# Altium PCB menb_HV_v1.0 - Cu.PcbDoc (part 3 of 3)
Units mil, origin at the board's own origin, x right, y up, seen from the top; angles counter-clockwise.
Board outline 6102.36 x 4921.26 mil, 2 copper layers (Top Layer, Bottom Layer); 139 components, 224 nets, 601 pads, 106 vias.
Unrouted connection lines stored in the file: 1.
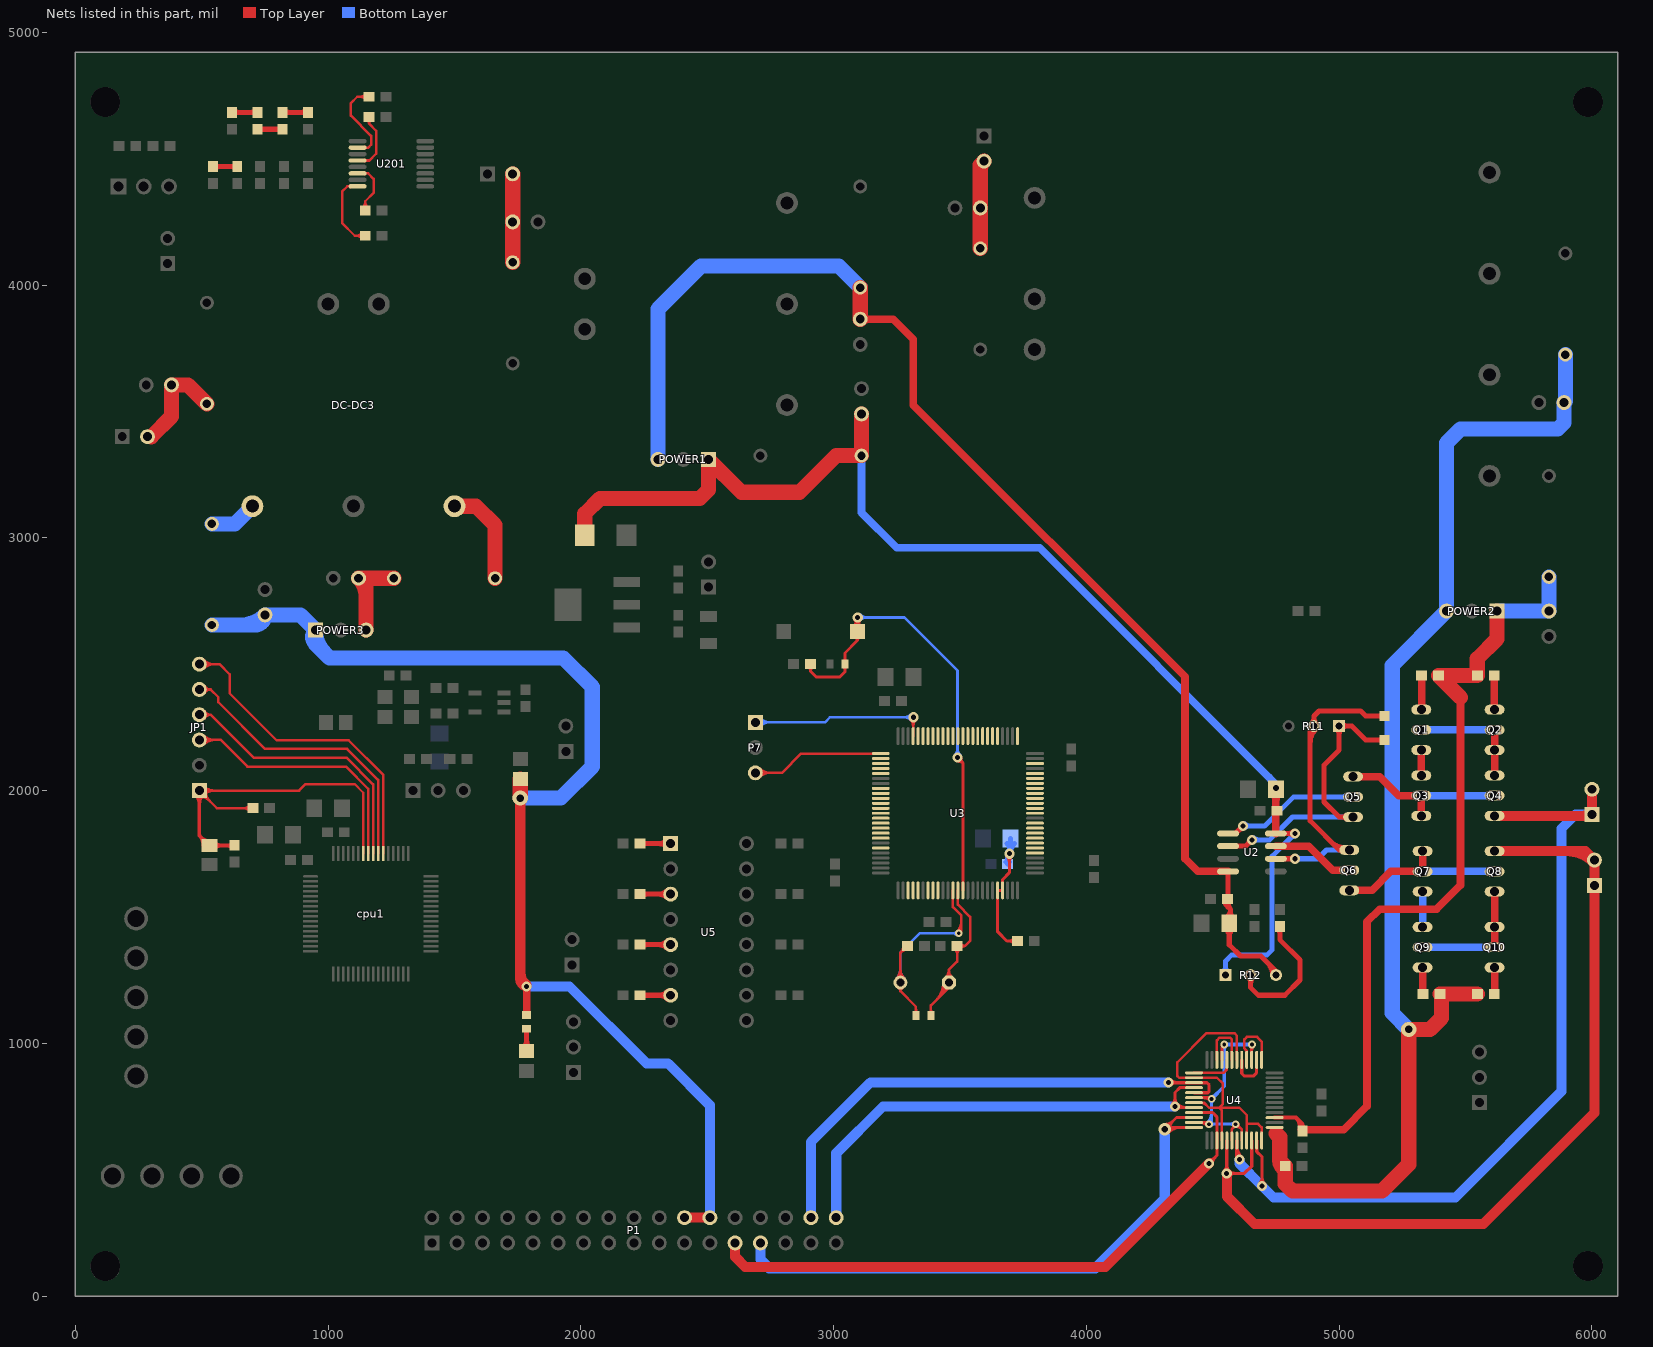
[diagram p3: the nets of this part, all layers, seen from the top]

## Via types
v1: diameter 40, hole 20, Top Layer to Bottom Layer, tented both sides, 48 vias
v2: diameter 20, hole 10, Top Layer to Bottom Layer, tented both sides, 20 vias
v3: diameter 30, hole 15, Top Layer to Bottom Layer, tented both sides, 20 vias
v4: diameter 50, hole 25, Top Layer to Bottom Layer, 5 vias
v5: diameter 50, hole 25, Top Layer to Bottom Layer, tented both sides, 4 vias
v6: diameter 40, hole 20, Top Layer to Bottom Layer, 2 vias
v7: diameter 50, hole 28, Top Layer to Bottom Layer, 1 vias
v8: diameter 30, hole 20, Top Layer to Bottom Layer, tented both sides, 1 vias
v9: diameter 31, hole 15, Top Layer to Bottom Layer, tented both sides, 1 vias
v10: diameter 70, hole 35, Top Layer to Bottom Layer, tented both sides, 1 vias
v11: diameter 60, hole 30, Top Layer to Bottom Layer, tented both sides, 1 vias
v12: diameter 58, hole 28, Top Layer to Bottom Layer, 1 vias
v13: diameter 60, hole 30, Top Layer to Bottom Layer, 1 vias

## Nets (pads, with @x,y where several pads share a name; then routed paths per layer and width w, separated by ;. In a path a pad name is that pad's centre, name@x,y a point inside that pad or via, vN(x,y) a via of type N, cw(c..) or ccw(c..) an arc to the next point about the centre after c; other vN are vias at no path point) (continued)
NetDC-DC3_3: DC-DC3.3 P_L9.1 | length 401.1
  Top Layer w60: DC-DC3.3@1500,3125 1585,3125 1660,3050 P_L9.1@1660,2840
NetDC-DC3_5: DC-DC3.5 P_L8.1 | length 189
  Bottom Layer w60: P_L8.1@540,3055 630,3055 DC-DC3.5@700,3125
NetLED10_1: LED10.1 R60.1 | length 154.7
  Top Layer w20: LED10.1@1772.58,981.79 ccw(c1742.61,1011.76) 1785,1011.76 ccw(c1827.39,1011.76) LED10.1@1797.42,981.79 ; LED10.1@1785,969.37 R60.1@1785,1057.44
NetP_C1_1: P_C1.1 P_F1.2 P_L2.1 | length 350
  Top Layer w60: P_L2.1@1730,4090 P_C1.1@1730,4250 P_F1.2@1730,4440
NetP_C5_1: P_C5.1 P_F2.2 P_L4.1 | length 390.5
  Top Layer w60: P_L4.1@3580,4145 P_C5.1@3580,4305 3580,4475 P_F2.2@3595,4490 ; 3580,4454.93 cw(c3630.07,4454.93) P_F2.2@3594.67,4490.33
NetP_C7_1: P_C7.1 P_F3.2 P_L7.1 | length 424.2
  Top Layer w40: P_F3.2@285,3400 P_F3.2@300,3400
  Top Layer w60: P_F3.2@300,3400 380,3480 P_C7.1@380,3605 445,3605 P_L7.1@520,3530
NetQ1_1: Q1.1 R9.1 | length 135
  Top Layer w20: Q1.1@5325,2320 Q1.1@5325,2321.54
  Top Layer w30: Q1.1@5326.54,2321.54 R9.1@5326.54,2455
NetQ1_2: Q1.2 Q2.2 Q2.3 Q4.1 | length 470
  Top Layer w30: Q4.1@5615,2060 Q2.3@5615,2160 Q2.2@5615,2240
  Bottom Layer w30: Q1.2@5325,2240 Q2.2@5615,2240
NetQ1_3: Q1.3 Q3.1 | length 100
  Top Layer w30: Q3.1@5325,2060 Q1.3@5325,2160
NetQ2_1: Q2.1 R10.1 | length 135.6
  Top Layer w30: R10.1@5613.46,2455 5613.46,2321.54 Q2.1@5615,2320
NetQ3_2: Q3.2 Q3.3 Q4.2 Q5.3 | length 671.1
  Top Layer w30: Q5.3@5055,2055 5160,2055 5235,1980 Q3.2@5325,1980 Q3.3@5325,1900
  Bottom Layer w30: Q3.2@5325,1980 Q4.2@5615,1980
NetQ5_1: pad.0@5180,2200 Q5.1 R11.1 U2.2 | length 1499
  Top Layer w20: U2.2@4560.51,1780 4630,1780 v1(4655,1805) ; v1@4645,1805 cw(c4620.86,1805) 4637.93,1787.93 cw(c4655,1770.86) v1@4655,1795 ; R11.1@4990.37,2245.37 cw(c4967.11,2222.11) 5000,2222.11 cw(c5032.89,2222.11) 5009.63,2245.37 cw(c5032.89,2222.11) 5032.89,2255 cw(c5032.89,2287.89) R11.1@5009.63,2264.63 ; Q5.1@5028.47,1888.15 ccw(c5011.93,1871.62) 5011.93,1895 ccw(c5011.93,1918.38) Q5.1@5028.47,1901.85 ; Q5.1@5055,1895 5000,1895 4940,1955 4940,2100 5000,2160 R11.1@5000,2255 5050,2255 5105,2200 pad.0@5180,2200 ; pad.0@5173.15,2193.15 ccw(c5156.62,2176.62) 5156.62,2200 ccw(c5156.62,2223.38) pad.0@5173.15,2206.85
  Bottom Layer w20: v1(4655,1805) 4725,1805 4815,1895 Q5.1@5055,1895 ; v1@4662.07,1797.93 cw(c4679.14,1780.86) 4679.14,1805 cw(c4679.14,1829.14) v1@4662.07,1812.07 ; Q5.1@5028.47,1888.15 ccw(c5011.93,1871.62) 5011.93,1895 ccw(c5011.93,1918.38) Q5.1@5028.47,1901.85
NetQ5_2: Q5.2 U2.1 | length 667.1
  Top Layer w20: U2.1@4560.51,1830 4590,1830 v1(4620,1860) ; v1@4610,1860 cw(c4585.86,1860) 4602.93,1842.93 cw(c4620,1825.86) v1@4620,1850
  Bottom Layer w20: v1(4620,1860) 4705,1860 4820,1975 Q5.2@5055,1975 ; v1@4627.07,1852.93 cw(c4644.14,1835.86) 4644.14,1860 cw(c4644.14,1884.14) v1@4627.07,1867.07 ; Q5.2@5028.47,1968.15 ccw(c5011.93,1951.62) 5011.93,1975 ccw(c5011.93,1998.38) Q5.2@5028.47,1981.85
NetQ6_1: pad.0@5180,2295 Q6.1 R11.2 U2.6 | length 1606.7
  Top Layer w20: U2.6@4749.49,1730 v1(4825,1730) ; v1@4817.93,1722.93 ccw(c4800.86,1705.86) 4800.86,1730 ccw(c4800.86,1754.14) v1@4817.93,1737.07 ; 4885,2185.9 cw(c4969.1,2185.9) R11.2@4909.63,2245.37 ; 4885,2234.18 cw(c4920.82,2234.18) R11.2@4895.49,2259.51 ; R11.2@4890.37,2264.63 ccw(c4867.11,2287.89) 4900,2287.89 ccw(c4932.89,2287.89) R11.2@4909.63,2264.63 ; 4969.1,1795.9 ccw(c5020.31,1847.11) Q6.1@5020.31,1774.68 ; Q6.1@5012.79,1758.9 ccw(c5000,1748.54) 5000,1765 ; Q6.1@5012.79,1771.1 cw(c5000,1781.46) 5000,1765 ; Q6.1@5040,1765 5000,1765 ; pad.0@5173.15,2288.15 ccw(c5156.62,2271.62) 5156.62,2295 ccw(c5156.62,2318.38) pad.0@5173.15,2301.85 ; pad.0@5180,2295 5105,2295 5085,2315 4920,2315 4900,2295 R11.2@4900,2255 4885,2240 4885,1880 5000,1765
  Bottom Layer w20: v1(4825,1730) 4915,1730 4950,1765 Q6.1@5040,1765 ; v1@4832.07,1722.93 cw(c4849.14,1705.86) 4849.14,1730 cw(c4849.14,1754.14) v1@4832.07,1737.07 ; Q6.1@5013.47,1758.15 ccw(c4996.93,1741.62) 4996.93,1765 ccw(c4996.93,1788.38) Q6.1@5013.47,1771.85
NetQ6_2: Q6.2 U2.7 | length 329.9
  Top Layer w30: U2.7@4749.49,1780 4880,1780 4975,1685 Q6.2@5040,1685
NetQ6_3: Q6.3 Q7.2 Q7.3 Q8.2 | length 686.1
  Top Layer w30: Q6.3@5040,1605 5130,1605 5205,1680 Q7.2@5330,1680 Q7.3@5330,1760
  Bottom Layer w30: Q7.2@5330,1680 Q8.2@5615,1680
NetQ7_1: Q7.1 Q9.3 | length 140
  Bottom Layer w30: Q9.3@5330,1460 Q7.1@5330,1600
NetQ8_1: Q8.1 Q9.2 Q10.2 Q10.3 | length 505
  Top Layer w30: Q10.2@5615,1380 Q10.3@5615,1460 Q8.1@5615,1600
  Bottom Layer w30: Q9.2@5330,1380 Q10.2@5615,1380
NetQ9_1: Q9.1 R14.2 | length 103.5
  Top Layer w30: R14.2@5330,1196.54 Q9.1@5330,1300
NetQ10_1: Q10.1 R15.2 | length 105.6
  Top Layer w30: R15.2@5613.46,1195 5615,1196.54 Q10.1@5615,1300
NetR8_2: R8.2 U5.5 | length 237.3
  Top Layer w20: R8.2@2233.46,1390 U5.5@2355,1390 U5.5@2360,1390 ; R8.2@2242.28,1383.15 cw(c2258.81,1366.62) 2258.81,1390 cw(c2258.81,1413.38) R8.2@2242.28,1396.85 ; U5.5@2341.19,1376.19 ccw(c2307.86,1342.86) 2307.86,1390 ccw(c2307.86,1437.14) U5.5@2341.19,1403.81
NetR12_2: R12.2 R13.2 | length 615.3
  Top Layer w20: R12.2@4640.37,1260.37 cw(c4617.11,1237.11) 4650,1237.11 cw(c4682.89,1237.11) R12.2@4659.63,1260.37 ; R12.2@4650,1270 4650,1220 4680,1190 4785,1190 4845,1250 4845,1330 4765,1410 R13.2@4765,1461.54 ; R13.2@4758.15,1452.72 cw(c4741.62,1436.19) 4765,1436.19 cw(c4788.38,1436.19) R13.2@4771.85,1452.72
NetR19_2: R19.2 U5.7 | length 237.3
  Top Layer w20: R19.2@2233.46,1190 U5.7@2355,1190 U5.7@2360,1190 ; R19.2@2242.28,1183.15 cw(c2258.81,1166.62) 2258.81,1190 cw(c2258.81,1213.38) R19.2@2242.28,1196.85 ; U5.7@2341.19,1176.19 ccw(c2307.86,1142.86) 2307.86,1190 ccw(c2307.86,1237.14) U5.7@2341.19,1203.81
NetR23_2: R23.2 U5.1 | length 232.3
  Top Layer w20: R23.2@2233.46,1790 U5.1@2355,1790 ; R23.2@2242.28,1783.15 cw(c2258.81,1766.62) 2258.81,1790 cw(c2258.81,1813.38) R23.2@2242.28,1796.85 ; U5.1@2341.19,1776.19 ccw(c2307.86,1742.86) 2307.86,1790 ccw(c2307.86,1837.14) U5.1@2341.19,1803.81
NetR24_2: R24.2 U5.3 | length 232.3
  Top Layer w20: R24.2@2233.46,1590 U5.3@2355,1590 ; R24.2@2242.28,1583.15 cw(c2258.81,1566.62) 2258.81,1590 cw(c2258.81,1613.38) R24.2@2242.28,1596.85 ; U5.3@2341.19,1576.19 ccw(c2307.86,1542.86) 2307.86,1590 ccw(c2307.86,1637.14) U5.3@2341.19,1603.81
NetR200_1: R200.1 R201.2 | length 173.5
  Top Layer w20: R200.1@620,4683.46 R201.2@720,4683.46 ; R200.1@626.85,4676.62 cw(c643.38,4660.08) 643.38,4683.46 cw(c643.38,4706.85) R200.1@626.85,4690.31 ; R201.2@713.15,4676.62 ccw(c696.62,4660.08) 696.62,4683.46 ccw(c696.62,4706.85) R201.2@713.15,4690.31
NetR201_1: R201.1 R202.2 | length 173.5
  Top Layer w20: R201.1@720,4616.54 R202.2@820,4616.54 ; R201.1@726.85,4609.69 cw(c743.38,4593.15) 743.38,4616.54 cw(c743.38,4639.92) R201.1@726.85,4623.38 ; R202.2@813.15,4609.69 ccw(c796.62,4593.15) 796.62,4616.54 ccw(c796.62,4639.92) R202.2@813.15,4623.38
NetR202_1: R202.1 R205.2 | length 173.5
  Top Layer w20: R202.1@820,4683.46 R205.2@920,4683.46 ; R202.1@826.85,4676.62 cw(c843.38,4660.08) 843.38,4683.46 cw(c843.38,4706.85) R202.1@826.85,4690.31 ; R205.2@913.15,4676.62 ccw(c896.62,4660.08) 896.62,4683.46 ccw(c896.62,4706.85) R205.2@913.15,4690.31
NetR203_1: R203.1 U201.2 | length 408.8
  Top Layer w10: U201.2@1116.14,4543.98 1158.98,4543.98 1170,4555 1170,4590 1090,4670 1090,4720 1115,4745 R203.1@1161.54,4745 ; U201.2@1145.44,4541.25 cw(c1152.03,4534.66) 1152.03,4543.98 cw(c1152.03,4553.29) U201.2@1145.44,4546.7 ; R203.1@1149.18,4734.62 ccw(c1124.11,4709.55) 1124.11,4745 ccw(c1124.11,4780.45) R203.1@1149.18,4755.38
NetR204_1: R204.1 U201.4 | length 290.2
  Top Layer w10: U201.4@1116.14,4492.8 1162.8,4492.8 1190,4520 1190,4610 1161.54,4638.46 ; U201.4@1145.44,4490.07 cw(c1152.03,4483.48) 1152.03,4492.8 cw(c1152.03,4502.11) U201.4@1145.44,4495.52 ; R204.1@1153.74,4652.56 cw(c1144.91,4638.47) 1161.54,4638.47 ; R204.1@1161.54,4665 1161.54,4638.46 ; R204.1@1169.33,4652.56 ccw(c1178.17,4638.47) 1161.54,4638.47
NetR206_1: R206.1 U201.6 | length 282
  Top Layer w10: U201.6@1116.14,4441.61 1158.39,4441.61 1180,4420 1180,4365 1146.54,4331.54 R206.1@1146.54,4295 ; R206.1@1136.15,4305.38 ccw(c1111.08,4330.45) 1146.54,4330.45 ccw(c1181.99,4330.45) R206.1@1156.92,4305.38 ; U201.6@1145.44,4438.89 cw(c1152.03,4432.3) 1152.03,4441.61 cw(c1152.03,4450.93) U201.6@1145.44,4444.34
NetR207_1: R207.1 U201.8 | length 377.2
  Top Layer w10: U201.8@1086.84,4387.7 ccw(c1080.25,4381.12) 1080.25,4390.43 ccw(c1080.25,4399.75) U201.8@1086.84,4393.16 ; U201.8@1116.14,4390.43 1075.43,4390.43 1055,4370 1055,4245 1105,4195 R207.1@1146.54,4195 ; R207.1@1134.18,4184.62 ccw(c1109.11,4159.55) 1109.11,4195 ccw(c1109.11,4230.45) R207.1@1134.18,4205.38
NetR211_1: R211.1 R212.2 | length 168.5
  Top Layer w20: R212.2@545,4468.46 R211.1@640,4468.46 ; R212.2@551.85,4461.62 cw(c568.38,4445.08) 568.38,4468.46 cw(c568.38,4491.85) R212.2@551.85,4475.31 ; R211.1@633.15,4461.62 ccw(c616.62,4445.08) 616.62,4468.46 ccw(c616.62,4491.85) R211.1@633.15,4475.31
NetU4_4: U4.4 U4.9 U4.12 U4.30 U4.38 U4.43 | length 1330.5
  Top Layer w10: U4.43@4425.55,765.16 4464.84,765.16 4485,745 4525,745 ; U4.43@4455.08,764.25 cw(c4455.08,738.49) 4473.29,756.71 ; U4.4@4535.79,615.55 4535.79,734.21 4525,745 ; U4.30@4594.84,934.45 4594.84,1030.16 4585,1040 4475,1040 4360,925 4360,870 4366.42,863.58 U4.38@4425.55,863.58 4516.42,863.58 4540,840 4540,760 4525,745 ; U4.9@4634.21,615.55 4634.21,680.79 ; U4.12@4693.27,615.55 4693.27,666.73 4679.21,680.79 4634.21,680.79 ; 4525,745 4605,745 4634.21,715.79 4634.21,680.79
NetU4_6: U4.6 U4.8 U4.27 U4.33 U4.42 U4.47 | length 1399.3
  Top Layer w10: v3@4478.58,686.42 v3(4485,680) ; v3@4490.16,784.84 v3(4495,780) ; U4.6@4575.16,615.55 4575.16,660.16 ; v3@4580.25,677.79 cw(c4561.73,673.58) 4575.16,660.16 ; 4581.46,666.46 cw(c4590,657.93) v3@4590,670 ; v3@4590.34,670.01 cw(c4591.47,637.41) 4614.53,660.47 ; v3@4600,680 ccw(c4612.07,680) 4603.54,671.46 ; U4.8@4614.53,615.55 4614.53,660.47 ; v3@4653.9,993.9 v3(4655,995) ; 4575.16,660.16 4590,675 4600,675 4614.53,660.47
  Top Layer w12: U4.47@4425.55,686.42 v3@4478.58,686.42 ; U4.42@4425.55,784.84 v3@4490.16,784.84 ; U4.47@4447.78,686.42 cw(c4447.78,642.78) v3@4478.64,673.64 ; 4461.58,784.84 cw(c4461.58,746.58) v3@4488.64,773.64 ; U4.33@4535.79,934.45 4535.79,985.79 v3(4545,995) ; v3@4648.64,988.64 cw(c4635.93,975.93) 4653.9,975.93 ; U4.27@4653.9,934.45 v3@4653.9,993.9 ; 4653.9,970.61 cw(c4679.39,970.61) v3@4661.36,988.64
  Bottom Layer w12: v3@4478.64,686.36 ccw(c4439.13,725.87) 4495,725.87 ; v3@4487.12,677.88 ccw(c4468.1,696.9) 4495,696.9 ; v3@4488.64,773.64 cw(c4473.27,758.27) 4495,758.27 cw(c4516.73,758.27) v3@4501.36,773.64 ; v3@4491.36,673.64 cw(c4506.73,658.27) 4506.73,680 cw(c4506.73,701.73) v3@4491.36,686.36 ; v3(4495,780) 4495,690 v3(4485,680) v3(4590,680) ; v3@4583.64,673.64 ccw(c4568.27,658.27) 4568.27,680 ccw(c4568.27,701.73) v3@4583.64,686.36
  Bottom Layer w15: v3(4495,780) 4545,830 v3(4545,995) v3(4655,995) ; v3@4495,787.5 ccw(c4495,805.61) 4507.8,792.8 ccw(c4520.61,780) v3@4502.5,780 ; v3@4539.7,989.7 cw(c4526.89,976.89) 4545,976.89 cw(c4563.11,976.89) 4550.3,989.7 cw(c4563.11,976.89) 4563.11,995 cw(c4563.11,1013.11) v3@4550.3,1000.3 ; v3@4649.7,989.7 ccw(c4636.89,976.89) 4636.89,995 ccw(c4636.89,1013.11) v3@4649.7,1000.3
NRST: C33.2 R17.1 S1.1 U3.14 | length 2268.7
  Top Layer w10: v1@3093.62,2683.62 v1(3095,2685)
  Top Layer w12: C33.2@2899.92,2489.31 cw(c2885.71,2471.54) 2908.46,2471.54 ; C33.2@2908.46,2500 2908.46,2471.54 ; C33.2@2917.01,2489.31 ccw(c2931.22,2471.54) 2908.46,2471.54 ; R17.1@3039.03,2490.56 cw(c3025.75,2477.28) 3044.53,2477.28 cw(c3063.31,2477.28) R17.1@3050.03,2490.56 ; R17.1@3039.03,2509.44 ccw(c3025.75,2522.72) 3044.53,2522.72 ccw(c3063.31,2522.72) R17.1@3050.03,2509.44 ; S1.1@3077.69,2647.31 ccw(c3044.29,2683.62) v1@3093.62,2683.62 ; v1@3083.33,2677.27 cw(c3062.81,2663.69) 3086.58,2657.32 cw(c3107.25,2651.79) v1@3099.84,2671.86 ; S1.1@3083.97,2608.54 cw(c3077.26,2593.62) 3093.62,2593.62 ; v1@3085.1,2675.1 cw(c3064.53,2654.53) S1.1@3093.62,2654.53 ; v1@3090.24,2671.83 cw(c3085.22,2657.96) 3099.47,2661.78 cw(c3110.66,2664.77) v1@3103.57,2673.93 ; S1.1@3093.62,2647.87 cw(c3132.13,2647.87) v1@3104.9,2675.1 ; S1.1@3103.27,2608.54 ccw(c3109.98,2593.62) 3093.62,2593.62 ; S1.1@3109.55,2647.31 cw(c3142.96,2683.62) v1@3093.62,2683.62 ; v1(3490,2130) 3510.9,2109.09 ; v1@3491.39,2116.07 cw(c3493.78,2091.98) 3510.9,2109.1 ; v1@3503.93,2128.61 ccw(c3528.02,2126.22) 3510.9,2109.1 ; U3.14@3510.9,1605 3510.9,2109.09 ; 2908.46,2471.54 2930,2450 3025,2450 3044.53,2469.53 R17.1@3044.53,2500 3044.53,2544.53 3093.62,2593.62 ; 3093.62,2593.62 S1.1@3093.62,2630 v1@3093.62,2683.62
  Bottom Layer w12: v1(3095,2685) 3280,2685 3490,2475 v1(3490,2130) ; v1@3104.9,2675.1 cw(c3128.8,2651.2) 3128.8,2685 cw(c3128.8,2718.8) v1@3104.9,2694.9 ; v1@3480.1,2139.9 ccw(c3456.2,2163.8) 3490,2163.8 ccw(c3523.8,2163.8) v1@3499.9,2139.9
OSC_IN: C26.1 R16.2 U3.12 Y1.2 | length 1379.3
  Top Layer w10: Y1.2@3247.99,1255.95 ccw(c3209.47,1294.46) 3263.94,1294.46 ccw(c3318.4,1294.46) Y1.2@3279.89,1255.95 ; Y1.2@3255.06,1248.88 ccw(c3233.62,1270.32) 3263.94,1270.32 ccw(c3294.26,1270.32) Y1.2@3272.82,1248.88 ; Y1.2@3255.21,1219.2 cw(c3249.69,1206.06) 3263.94,1206.06 ; 3267.86,1361.32 cw(c3289.57,1339.61) C26.1@3289.57,1370.32 ; Y1.2@3272.67,1219.2 ccw(c3278.18,1206.06) 3263.94,1206.06 ; C26.1@3274.89,1384.68 cw(c3237.49,1383.85) 3263.94,1357.4 ; C26.1@3291.54,1385 3263.94,1357.4 ; R16.2@3319.26,1120.14 ccw(c3304.28,1135.13) 3325.47,1135.13 ccw(c3346.67,1135.13) R16.2@3331.68,1120.14 ; R16.2@3325.47,1110 3325.47,1144.53 3263.94,1206.06 ; U3.12@3471.53,1605 3471.53,1538.47 3505,1505 3505,1445 v3(3495,1435) ccw(c3470.86,1459.14) 3505,1459.14 ; v3@3487.93,1442.07 ccw(c3446.72,1483.28) 3505,1483.28 ; 3263.94,1206.06 Y1.2@3263.94,1240 3263.94,1357.4
  Bottom Layer w10: Y1.2@3247.99,1255.95 ccw(c3209.47,1294.46) 3263.94,1294.46 ccw(c3318.4,1294.46) Y1.2@3279.89,1255.95 ; Y1.2@3255.06,1248.88 ccw(c3233.62,1270.32) 3263.94,1270.32 ccw(c3294.26,1270.32) Y1.2@3272.82,1248.88 ; Y1.2@3263.94,1240 3263.94,1358.94 3340,1435 v3(3495,1435) ; v3@3487.93,1427.93 ccw(c3470.86,1410.86) 3470.86,1435 ccw(c3470.86,1459.14) v3@3487.93,1442.07
OSC_OUT: C30.1 R16.1 U3.13 Y1.1 | length 1005.4
  Top Layer w10: R16.1@3378.32,1120.14 ccw(c3363.33,1135.13) 3384.53,1135.13 ccw(c3405.72,1135.13) R16.1@3390.74,1120.14 ; R16.1@3384.53,1110 3384.53,1149.53 Y1.1@3453.46,1218.46 ; 3404.16,1169.16 ccw(c3333.32,1240) Y1.1@3433.5,1240 ; 3421.23,1186.23 ccw(c3367.47,1240) Y1.1@3443.5,1240 ; 3438.3,1203.3 ccw(c3401.61,1240) Y1.1@3453.5,1240 ; Y1.1@3440.87,1256.68 ccw(c3409.56,1291.06) 3456.06,1291.06 ; Y1.1@3447.61,1249.29 ccw(c3430.17,1268.43) 3456.06,1268.43 ccw(c3481.95,1268.43) Y1.1@3464.52,1249.29 ; Y1.1@3456.06,1240 3456.06,1291.06 ; Y1.1@3471.25,1256.68 cw(c3502.57,1291.06) 3456.06,1291.06 ; C30.1@3478.08,1374.62 cw(c3453.01,1349.55) 3488.46,1349.55 cw(c3523.92,1349.55) C30.1@3498.85,1374.62 ; U3.13@3491.22,1605 3491.22,1548.78 3540,1500 3540,1405 3520,1385 ; C30.1@3502.13,1376.13 cw(c3520,1362.58) 3520,1385 ; C30.1@3502.13,1393.87 ccw(c3520,1407.42) 3520,1385 ; 3456.06,1291.06 3488.46,1323.46 C30.1@3488.46,1385 3520,1385
OUT1+: P1.25 U4.3 U4.45 | length 2463.8
  Top Layer w12: U4.45@4425.55,725.79 4499.21,725.79 4516.1,708.9 U4.3@4516.1,615.55 4516.1,556.1 v1(4485,525) ; v1@4485,539 ccw(c4485,572.8) 4508.9,548.9 ccw(c4532.8,525) v1@4499,525
  Top Layer w40: P1.25@2610,210 2610,155 2650,115 4075,115 v1(4485,525)
OUT1-: P1.27 U4.46 U4.48 | length 2487.3
  Top Layer w12: v4(4310,660) v4@4316.73,666.73 ; v4@4310,679 ccw(c4310,724.87) 4342.44,692.44 ccw(c4374.87,660) v4@4329,660 ; v4@4314.95,655.05 cw(c4343.15,626.85) 4343.15,666.73 ; v4@4323.44,646.56 cw(c4372.12,597.88) 4372.12,666.73 ; v4@4323.44,673.44 ccw(c4339.62,689.62) 4339.62,666.73 ; U4.48@4425.55,666.73 v4@4316.73,666.73 ; U4.46@4425.55,706.1 4356.1,706.1 v4@4316.73,666.73
  Bottom Layer w40: P1.27@2710,210 2710,145 2745,110 4035,110 4310,385 v4(4310,660)
OUT2+: P1.34 U4.40 U4.44 | length 1990.5
  Top Layer w12: v1@4340.1,759.9 ccw(c4316.2,783.8) 4350,783.8 ccw(c4383.8,783.8) 4359.9,759.9 ccw(c4394.73,794.73) U4.44@4394.73,745.47 ; v1@4359.9,740.1 cw(c4372.87,727.13) 4372.87,745.47 ; U4.44@4425.55,745.47 4360,745.47 4350,755.47 4350,805 4369.21,824.21 U4.40@4425.55,824.21
  Bottom Layer w40: P1.34@3010,310 3010,565 3195,750 v1(4350,750)
OUT2-: P1.32 U4.39 U4.41 | length 2112.8
  Top Layer w13: v1@4326.1,843.9 U4.39@4425.55,843.9 4476.1,843.9 4485,835 4485,810 4479.53,804.53 U4.41@4425.55,804.53 ; v1@4334.55,835.45 cw(c4354.93,815.07) 4354.93,843.9 ; v1@4334.55,854.55 ccw(c4360.25,880.25) 4360.25,843.9
  Bottom Layer w40: P1.32@2910,310 2910,610 3145,845 v1(4325,845)
OUT3+: U4.32 U4.37 | length 193.6
  Top Layer w10: U4.37@4425.55,883.27 4543.27,883.27 4555.47,895.47 U4.32@4555.47,934.45 ; 4547.25,887.25 ccw(c4529.57,904.92) U4.32@4554.57,904.92
OUT3-: U4.31 U4.34 | length 223.6
  Top Layer w10: U4.34@4516.1,934.45 4516.1,1011.1 4527,1022 4568,1022 4575.16,1014.84 U4.31@4575.16,934.45
OUT4+: U4.26 U4.29 | length 173.9
  Top Layer w12: U4.29@4614.53,934.45 4614.53,880.47 4625,870 4660,870 4673.58,883.58 U4.26@4673.58,934.45
OUT4-: U4.25 U4.28 | length 251.3
  Top Layer w10: 4627.85,977.15 cw(c4614.68,963.98) U4.28@4633.31,963.98 ; U4.28@4634.21,934.45 4634.21,970.79 4625,980 4625,1015 4635,1025 4675,1025 4693.27,1006.73 U4.25@4693.27,934.45
P3V3A: C31.2 C32.1 R18.2 U3.21 U3.22 | length 880.4
  Top Layer w12: v1@3685.1,1740.1 cw(c3661.2,1716.2) 3695,1716.2 cw(c3728.8,1716.2) v1@3704.9,1740.1 ; v1(3695,1750) 3695,1675 3668.39,1648.39 U3.22@3668.39,1605 U3.21@3648.7,1605 3648.7,1441.3 3685,1405 R18.2@3726.54,1405 ; R18.2@3714.89,1395.32 ccw(c3691.53,1371.96) 3691.53,1405 ccw(c3691.53,1438.04) R18.2@3714.89,1414.68
  Bottom Layer w20: C31.2@3681.62,1716.85 ccw(c3665.08,1733.38) 3688.46,1733.38 ccw(c3711.85,1733.38) C31.2@3695.31,1716.85 ; C32.1@3685.17,1790.66 cw(c3650.64,1755.16) v1@3700.16,1755.16 ; C31.2@3685.55,1722.51 cw(c3715.5,1714.48) v1@3700,1741.34 ; v1@3687.93,1757.07 ccw(c3658.41,1786.59) C32.1@3700.16,1786.59 ; C31.2@3688.46,1710 3688.46,1743.46 v1(3695,1750) v1@3700.16,1755.16 ; C31.2@3688.46,1710.08 cw(c3734.92,1710.08) v1@3702.07,1742.93 ; v1@3690,1758.66 ccw(c3671.7,1790.35) C32.1@3707.05,1780.88 ; C32.1@3700.16,1810 v1@3700.16,1755.16 ; C32.1@3715.15,1790.66 ccw(c3749.68,1755.16) v1@3700.16,1755.16
PA5: U3.30
PA6: U3.31
PA7: U3.32
PA8: U3.67
PA9: U3.68
PA10: U3.69
PA11: U3.70
PA12: U3.71
PA13: P7.1 U3.72 | length 970.3
  Top Layer w10: v1@3304.39,2279.39 cw(c3281.07,2256.07) 3314.05,2256.07 ; U3.72@3314.06,2215.24 3314.06,2289.05 v1(3315,2290) ; 3314.06,2251.51 cw(c3353.49,2251.51) v1@3325.61,2279.39
  Bottom Layer w10: P7.1@2690,2270 2965,2270 2985,2290 v1(3315,2290) ; P7.1@2700.27,2259.73 cw(c2725.07,2234.93) 2725.07,2270 cw(c2725.07,2305.07) P7.1@2700.27,2280.27 ; P7.1@2707.34,2252.66 cw(c2749.21,2210.79) 2749.21,2270 cw(c2749.21,2329.21) P7.1@2707.34,2287.34 ; v1@3304.39,2279.39 ccw(c3278.79,2253.79) 3278.79,2290 ccw(c3278.79,2326.21) v1@3304.39,2300.61
PA14: P7.3 U3.76 | length 675.8
  Top Layer w10: P7.3@2690,2070 2795,2070 2871.34,2146.34 U3.76@3186.1,2146.34 ; P7.3@2700.27,2059.73 cw(c2725.07,2034.93) 2725.07,2070 cw(c2725.07,2105.07) P7.3@2700.27,2080.27 ; P7.3@2707.34,2052.66 cw(c2749.21,2010.79) 2749.21,2070 cw(c2749.21,2129.21) P7.3@2707.34,2087.34
PA15: U3.77
PB0: U3.35
PB1: U3.36
PB3: U3.89
PB4: U3.90
PB5: U3.91
PB6: U3.92
PB7: U3.93
PB8: U3.95
PB11: U3.48
PB12: U3.51
PC4: U3.33
PC5: U3.34
PC6: U3.63
PC7: U3.64
PC8: U3.65
PC9: U3.66
PC10: U3.78
PC11: U3.79
PC12: U3.80
PC13: U3.7
PC14: U3.8
PC15: U3.9
PD2: U3.83
PD3: U3.84
PD4: U3.85
PD5: U3.86
PD6: U3.87
PD7: U3.88
PD8: U3.55
PD9: U3.56
PD10: U3.57
PD11: U3.58
PD12: U3.59
PD13: U3.60
PD14: U3.61
PD15: U3.62
PE4: U3.3
PE5: U3.4
PE6: U3.5
PE7: U3.38
PE8: U3.39
PE9: U3.40
PE10: U3.41
PE11: U3.42
PE12: U3.43
PE13: U3.44
PE14: U3.45
PE15: U3.46
RST1: C4.2 cpu1.58 DS1.1 JP1.1 R1.1 | length 2106.2
  Top Layer w10: JP1.1@490,1975.47 cw(c490,1916.26) 531.87,1958.13 cw(c573.74,2000) JP1.1@514.53,2000 ; JP1.1@490,1985.47 cw(c490,1950.4) 514.8,1975.2 cw(c539.6,2000) JP1.1@504.53,2000 ; JP1.1@500.27,1989.73 cw(c525.07,1964.93) 525.07,2000 cw(c525.07,2035.07) JP1.1@500.27,2010.27 ; JP1.1@507.34,1982.66 cw(c549.21,1940.79) 549.21,2000 cw(c549.21,2059.21) JP1.1@507.34,2017.34 ; R1.1@628.94,1782.4 R1.1@630,1783.46 ; C4.2@689.18,1919.62 ccw(c664.11,1894.55) 664.11,1930 ccw(c664.11,1965.45) C4.2@689.18,1940.38 ; C4.2@701.54,1930 560,1930 JP1.1@490,2000 885,2000 910,2025 1105,2025 1138.66,1991.34 cpu1.58@1138.66,1750.55
  Top Layer w15: JP1.1@474.42,1984.42 cw(c436.82,1946.82) 490,1946.82 cw(c543.18,1946.82) JP1.1@505.58,1984.42 ; JP1.1@490,2000 490,1822.4 ; 503.29,1809.11 ccw(c524.09,1829.91) DS1.1@524.09,1800.49 ; DS1.1@506.01,1782.73 ccw(c451.34,1783.74) 490,1822.4 ; DS1.1@548.7,1769.61 cw(c579.58,1738.73) 579.58,1782.4 cw(c579.58,1826.08) DS1.1@548.7,1795.19 ; 598.4,1782.4 cw(c598.4,1749.89) R1.1@621.38,1772.88 ; 602.77,1782.4 ccw(c602.77,1808.73) R1.1@621.38,1790.11 ; R1.1@628.94,1782.4 DS1.1@530,1782.4 490,1822.4
STIM+: P8.1 P8.2 Q4.3 U4.7 U4.11 | length 3654
  Top Layer w13: 4594.84,565.73 ccw(c4630.73,565.73) v6@4605.35,540.35 ; U4.7@4594.84,597.11 ccw(c4662.11,597.11) v6@4614.55,549.55 ; U4.7@4594.84,615.55 4594.84,550.16 v6(4605,540) ; U4.11@4673.58,615.55 4673.58,571.42 4695,550 v1(4695,435) ; v1@4685.45,444.55 ccw(c4662.41,467.59) 4695,467.59 ccw(c4727.59,467.59) v1@4704.55,444.55
  Top Layer w40: Q4.3@5615,1900 6000,1900 P8.1@6000,1905 P8.2@6000,2005 ; 5964.93,1900 ccw(c5964.93,1940.07) P8.1@5993.26,1911.74
  Bottom Layer w40: 4615.61,514.39 cw(c4641.21,540) v6(4605,540) 4605,525 v1(4695,435) 4740,390 5460,390 5880,810 5880,1850 5935,1905 P8.1@6000,1905
STIM-: P9.1 P9.2 Q8.3 U4.5 U4.10 | length 3739.5
  Top Layer w13: v1@4545.45,494.55 ccw(c4521.27,518.73) 4555.47,518.73 ; v1(4555,485) 4625,485 4653.9,513.9 U4.10@4653.9,615.55 ; v1@4555.47,485 U4.5@4555.47,615.55 ; 4555.47,516.45 ccw(c4586.45,516.45) 4564.55,494.55 ccw(c4587.59,517.59) 4587.59,485 ccw(c4587.59,452.41) v1@4564.55,475.45
  Top Layer w40: v1@4555.47,485 4555.47,394.53 4665,285 5570,285 6010,725 P9.1@6010,1625 P9.2@6010,1725 5975,1760 Q8.3@5615,1760 ; 5902.5,1760 cw(c5902.5,1617.5) P9.2@6003.26,1718.26
TCK: cpu1.57 JP1.3 | length 1152.6
  Top Layer w10: JP1.3@490,2200 575,2200 680,2095 1070,2095 1158.35,2006.65 cpu1.57@1158.35,1750.55 ; JP1.3@500.27,2189.73 cw(c525.07,2164.93) 525.07,2200 cw(c525.07,2235.07) JP1.3@500.27,2210.27 ; JP1.3@507.34,2182.66 cw(c549.21,2140.79) 549.21,2200 cw(c549.21,2259.21) JP1.3@507.34,2217.34
TDI: cpu1.55 JP1.5 | length 1217.3
  Top Layer w10: JP1.5@490,2400 535,2400 ; JP1.5@510.61,2386.71 cw(c535,2370.99) 535,2400 ; JP1.5@510.61,2413.29 ccw(c535,2429.01) 535,2400 ; cpu1.55@1197.72,1750.55 1197.72,2042.28 1075,2165 750,2165 565,2350 565,2370 535,2400
TDO: cpu1.54 JP1.6 | length 1412.7
  Top Layer w10: JP1.6@490,2500 570,2500 610,2460 610,2385 796.37,2198.63 1081.37,2198.63 1217.4,2062.6 cpu1.54@1217.4,1750.55 ; JP1.6@500.27,2489.73 cw(c525.07,2464.93) 525.07,2500 cw(c525.07,2535.07) JP1.6@500.27,2510.27 ; JP1.6@507.34,2482.66 cw(c549.21,2440.79) 549.21,2500 cw(c549.21,2559.21) JP1.6@507.34,2517.34
TMS: cpu1.56 JP1.4 | length 1133.6
  Top Layer w10: JP1.4@490,2300 535,2300 ; JP1.4@510.61,2286.71 cw(c535,2270.99) 535,2300 ; JP1.4@510.61,2313.29 ccw(c535,2329.01) 535,2300 ; cpu1.56@1178.03,1750.55 1177.35,1751.24 1177.35,2024.52 1071.87,2130 705,2130 535,2300
VCC5V1: P1.22 P1.24 P_C8.1 P_L8.2 POWER3.1 R6.2 R60.2 | length 5175.3
  Top Layer w30: R60.2@1785,1112.56 v1@1785,1230
  Top Layer w40: 1760,1285.36 ccw(c1845.36,1285.36) v1(1785,1225) cw(c1790.5,1255) 1760,1255 ; v11(1760,1970) 1760,1255 ; v1@1785,1230 1760,1255 ; P1.22@2410,310 P1.24@2510,310
  Top Layer w60: v11(1760,1970) R6.2@1760,2045.63
  Bottom Layer w40: v1(1785,1225) 1955,1225 2260,920 2345,920 2510,755 P1.24@2510,310
  Bottom Layer w60: P_L8.2@540,2655 710,2655 ; 654.57,2655 ccw(c654.57,2790.43) P_C8.1@750.33,2694.67 ; P_C8.1@750.47,2694.99 cw(c710,2695.47) 710,2655 ; POWER3.1@949.53,2635 ccw(c1081.17,2635) 988.08,2541.92 ; POWER3.1@949.66,2635.33 ccw(c977.83,2607.84) 950,2580 ; v11(1760,1970) 1920,1970 2045,2095 2045,2410 1930,2525 1005,2525 950,2580 ; 710,2655 P_C8.1@750,2695 890,2695 POWER3.1@950,2635 950,2580
VCC5V2: C21.1 C22.1 D1.A P_C2.1 P_L1.2 POWER1.1 R12.1 U2.8 | length 5280.7
  Top Layer w20: U2.8@4749.49,1830 v1(4825,1830) ; C21.1@4749.49,2004.37 C21.1@4750.12,2005 ; v1@4817.93,1822.93 ccw(c4800.86,1805.86) 4800.86,1830 ccw(c4800.86,1854.14) v1@4817.93,1837.07
  Top Layer w30: C21.1@4738.45,1989.4 cw(c4711.81,1962.76) 4749.49,1962.76 ; U2.8@4749.49,1830 C21.1@4749.49,2004.37 ; 4749.49,1959.72 cw(c4791.46,1959.72) C21.1@4761.78,1989.4 ; C21.1@4749.49,1984.62 cw(c4775.38,1984.62) C21.1@4757.07,2002.93 ; v4(4750,2010) 4750,2020 4750.12,2019.88 C21.1@4750.12,2005
  Top Layer w60: D1.A@2015,3010 2015,3095 2075,3155 2470,3155 2505,3190 POWER1.1@2505,3310 2635,3180 2865,3180 3010,3325 P_L1.2@3110,3325 P_C2.1@3110,3490
  Bottom Layer w20: R12.1@4540.37,1279.63 ccw(c4517.11,1302.89) 4550,1302.89 ccw(c4582.89,1302.89) R12.1@4559.63,1279.63 ; R12.1@4550,1270 4550,1325 4575,1350 4715,1350 4735,1370 4735,1740 v1(4825,1830) ; v1@4815,1830 cw(c4790.86,1830) 4807.93,1812.93 cw(c4825,1795.86) v1@4825,1820
  Bottom Layer w30: P_L1.2@3101.12,3316.12 cw(c3079.68,3294.68) 3110,3294.68 cw(c3140.32,3294.68) P_L1.2@3118.88,3316.12 ; P_L1.2@3110,3325 3110,3100 3250,2960 3815,2960 4750,2025 v4(4750,2010) ; 4722.32,2052.68 cw(c4679.64,2010) v4@4740,2010
VCC60V: C28.1 P_C4.1 P_L5.2 POWER2.1 R9.2 R10.2 U4.15 | length 3368.5
  Top Layer w15: U4.15@4744.45,706.1 4828.9,706.1 ; C28.1@4843.09,657.99 ccw(c4791.82,669.02) 4828.9,706.1 ; C28.1@4847.63,665.13 ccw(c4836.33,680) 4855,680 ; 4848.38,686.62 cw(c4823.88,662.12) C28.1@4857.75,654.84 ; C28.1@4855,653.46 4855,680 ; C28.1@4862.37,665.13 cw(c4873.67,680) 4855,680 ; 4828.9,706.1 4855,680
  Top Layer w30: C28.1@4855,658.46 5018.46,658.46 5110,750 5110,1480 5160,1530 5385,1530 5480,1625 5480,2368.46
  Top Layer w60: 5480,2368.46 R9.2@5393.46,2455 R10.2@5546.54,2455 5546.54,2521.54 5625,2600 POWER2.1@5625,2710
  Bottom Layer w60: POWER2.1@5625,2710 P_C4.1@5830,2710 P_L5.2@5830,2845
VEE5V1: P_C9.2 P_L9.2 POWER3.3 | length 492.6
  Top Layer w60: P_C9.2@1120.16,2840.44 cw(c1104.29,2797.57) 1150,2797.57 ; P_C9.2@1120.33,2840.33 cw(c1048.71,2768.71) 1150,2768.71 ; POWER3.3@1150,2635 1150,2810 P_C9.2@1120,2840 P_L9.2@1260,2840
VEE5V2: C23.2 C24.2 P_C3.2 P_L3.2 POWER1.3 R12.3 U2.4 | length 5500.4
  Top Layer w20: C23.2@4549.92,1455.86 cw(c4513.22,1419.17) 4565.12,1419.17 cw(c4617.01,1419.17) C23.2@4580.32,1455.86 ; C24.2@4551.62,1563.15 cw(c4535.08,1546.62) 4558.46,1546.62 cw(c4581.85,1546.62) C24.2@4565.31,1563.15 ; C24.2@4552.34,1576.4 ccw(c4570.37,1562.14) 4554.12,1545.88 ; C23.2@4552.68,1496.47 ccw(c4528.89,1530) 4570,1530 ; C24.2@4553.58,1576.85 ccw(c4536.86,1593.57) 4560.51,1593.57 ; C24.2@4558.46,1570 4558.46,1541.54 4570,1530 ; C24.2@4560.51,1572.05 U2.4@4560.51,1680 ; 4560.51,1593.19 ccw(c4583.62,1593.19) C24.2@4567.28,1576.85 ; C24.2@4568.03,1563.99 ccw(c4588.1,1548.1) 4570,1530 ; 4570,1519.05 ccw(c4605.23,1519.05) C23.2@4580.32,1494.14 ; 4716.14,1318.86 cw(c4667.28,1270) R12.3@4736.38,1270 ; R12.3@4750,1270 4750,1285 4690,1345 4610,1345 4565.12,1389.88 C23.2@4565.12,1475 4570,1479.88 4570,1530
  Top Layer w30: P_C3.2@3105,3865 3235,3865 3315,3785 3315,3525 4390,2450 4390,1730 4440,1680 U2.4@4560.51,1680 ; P_C3.2@3115.27,3854.73 cw(c3140.07,3829.93) 3140.07,3865 cw(c3140.07,3900.07) P_C3.2@3115.27,3875.27
  Top Layer w60: P_C3.2@3105,3865 P_L3.2@3105,3990
  Bottom Layer w60: POWER1.3@2305,3310 2305,3905 2475,4075 3020,4075 P_L3.2@3105,3990
VEE60V: C29.1 P_C6.2 P_L6.2 POWER2.3 R14.1 R15.1 U4.13 | length 4959.9
  Top Layer w60: 4750,643.51 4765,628.51 4765,536.54 ; 4765,537.34 ccw(c4806.9,537.34) C29.1@4777.27,507.71 ; C29.1@4777.47,507.52 cw(c4805,536.53) 4765,536.53 ; R15.1@5546.54,1195 R14.1@5398.46,1195 5405,1188.46 5405,1100 5360,1055 v13(5275,1055) 5275,520 5170,415 4815,415 4786.54,443.46 C29.1@4786.54,515 4765,536.54
  Bottom Layer w30: P_C6.2@5890,3535 P_C6.2@5895,3540
  Bottom Layer w60: v13(5275,1055) 5210,1120 5210,2495 POWER2.3@5425,2710 5425,3375 5480,3430 5865,3430 5890,3455 P_C6.2@5890,3535 ; P_C6.2@5895,3540 P_L6.2@5895,3725
pads on no net: 2.6 2.7 cpu1.7 cpu1.8 cpu1.9 cpu1.10 cpu1.11 JP2.2 P1.23 P1.26 P1.29 R11.3 U3.19 U3.73 U4.1 U4.2 U4.14 U4.16 U4.24 U4.35 U4.36 U201.10 U201.15

## Polygon pours and split planes (outlines as drawn)
DGND on Bottom Layer "Bottom-No Net" (solid, remove dead copper, pour order 2): 1755,35 1745,45 1745,2300 435,2300 440,2295 440,1375 605,1210 610,1205 610,805 820,595 850,565 850,35 1745,35
GND5V1 on Bottom Layer "Bottom-No Net" (solid, remove dead copper, pour order 8): 1795,50 2235,50 2235,2385 2120,2500 1830,2500 1655,2500 1650,2505 1650,3240 620,3240 635,3225 635,2365 1765,2365 1800,2330 1800,50
GND60V on Bottom Layer "Bottom-No Net" (solid, remove dead copper, pour order 10): 4930,4385 6055,4385 6060,4380 6060,275 4875,275 4880,280 4880,580 4880,4380 4875,4385
GND5V2 on Bottom Layer "Bottom-No Net" (solid, remove dead copper, pour order 16): 2190,3975 3360,3975 3370,3965 3370,2790 4830,2790 4820,2780 4820,890 2470,890 2470,2505 2470,2510 2385,2595 2375,2585 1875,2585 1875,3390 2160,3675 2180,3675 2180,3965 2185,3970
DGND on Top Layer "Bottom-No Net" (solid, remove dead copper, pour order 4): 1750,2300 1745,2295 1745,35 845,35 845,565 845,570 610,805 610,1200 610,1205 545,1270 525,1290 525,1665 525,1695 430,1790 425,1795 425,2295 1750,2295 1755,2300
GND5V1 on Top Layer "Bottom-No Net" (solid, remove dead copper, pour order 6): 1800,45 1805,50 2230,50 2235,55 2235,2090 2235,2385 2140,2480 1650,2480 1650,3170 1580,3240 630,3240 630,2400 625,2395 685,2335 1795,2335 1795,65 1800,60
GND60V on Top Layer "Bottom-No Net" (solid, remove dead copper, pour order 12): 4880,4385 6065,4385 6065,275 4880,275 4875,280 4875,4385
GND5V2 on Top Layer "Bottom-No Net" (solid, remove dead copper, pour order 14): 2475,890 4820,890 4830,900 4830,2785 3370,2785 3365,2790 3365,3620 3365,3980 3360,3975 2190,3975 2190,3675 1885,3370 1880,3365 1880,2585 2380,2585 2480,2485 2470,2475 2470,910

## Keep-outs
Keep-Out Layer:
  lines w10: -5,0 -5,4921.26 6102.36,4921.26 6102.36,0 -5,0

## Other copper
Top Layer:
  rectangle net 3.3V: 3765,2140 3830,2175
  rectangle net 3.3V: 3230,2180 3260,2260
  rectangle net A3V3: 990,1720 1020,1780
  rectangle net VEE60V: 4720,625 4785,670
  rectangle net GND: 1365,4440 1475,4525
  rectangle net D3V3: 900,1655 955,1670
  rectangle net OUT1-: 4295,645 4460,667.5

## Silkscreen, mask and mechanical layers (free items; w line width, h text height)
Top Overlay:
  lines w10: 395,2075 395,2300 ; 440,1840 540,1840 640,1840 640,2555 ; 440,1845 440,1945 ; 670,2565 770,2565
  text "MENB-C-H-DET-S-V1.1" at 2100,4820 h60
  text "2018.09.21" at 2275,4710 h60
  text "GND" at 295,4155 h30 r90
  text "IN_+12V" at 295,3930 h30 r90
  text "-5V2" at 2275,3215 h20
  text "G5V2" at 2370,3215 h20
  text "5V2" at 2465,3215 h20
  text "+" at 1965,3075 h20
  text "3.3V" at 2575,2820 h60
  text "5V1" at 910,2700 h30
  text "-5V1" at 1120,2695 h30
  text "-60V" at 5400,2615 h20
  text "G60V" at 5495,2615 h20
  text "60V" at 5590,2615 h20
  text "G5V1" at 1020,2550 h30
  text "+" at 3195,2510 h20
  text "SWIO" at 2525,2270 h30
  text "GND5v1" at 2010,2245 h30
  text "5V" at 2000,2135 h30
  text "SWCK" at 2525,2060 h30
  text "5:IN_+12V" at 445,1550 h50
  text "5" at 35,1485 h30 r90
  text "DAC1" at 1800,1415 h30
  text "4" at 35,1328.75 h30 r90
  text "4:12V_Li" at 465,1315 h50
  text "DAC2" at 1805,1295 h30
  text "3" at 35,1172.5 h30 r90
  text "3:GND" at 470,1155 h50
  text "2" at 35,1016.25 h30 r90
  text "2:Li_CRG+" at 470,1005 h50
  text "+" at 1830,990 h30
  text "GND5V1" at 2035,955 h60
  text "1" at 35,860 h30 r90
  text "1:Li_CRG-" at 475,860 h50
  text "G60V" at 5455,625 h60
  text "Li_CRG-" at 25,220 h30
  text "GND" at 430,215 h30
  text "12V_Li" at 575,215 h30
  text "Li_CRG+" at 330,75 h30 r90
Bottom Overlay:
  text "+" at 3700,1870 h20

## Text inside footprints (layer, text, board x,y; h text height)
P1: Top Overlay "2" at 1260,290 h50; Top Overlay "1" at 1275,185 h50; Top Overlay "33" at 3085,190 h50; Top Overlay "34" at 3080,295 h50
Q1: Top Overlay "3" at 5395,2210 h59.05 r180; Top Overlay "1" at 5390,2305 h59.05 r180
Q2: Top Overlay "3" at 5685,2210 h59.05 r180; Top Overlay "1" at 5680,2305 h59.05 r180
Q3: Top Overlay "3" at 5395,1950 h59.05 r180; Top Overlay "1" at 5390,2045 h59.05 r180
Q4: Top Overlay "3" at 5685,1950 h59.05 r180; Top Overlay "1" at 5680,2045 h59.05 r180
Q5: Top Overlay "3" at 4985,2005 h59.05; Top Overlay "1" at 4990,1910 h59.05
Q6: Top Overlay "3" at 5110,1655 h59.05 r180; Top Overlay "1" at 5105,1750 h59.05 r180
Q7: Top Overlay "3" at 5260,1710 h59.05; Top Overlay "1" at 5265,1615 h59.05
Q8: Top Overlay "3" at 5545,1710 h59.05; Top Overlay "1" at 5550,1615 h59.05
Q9: Top Overlay "3" at 5260,1410 h59.05; Top Overlay "1" at 5265,1315 h59.05
Q10: Top Overlay "3" at 5545,1410 h59.05; Top Overlay "1" at 5550,1315 h59.05
U3: Top Overlay "76" at 3225,2215 h30 r180; Top Overlay "51" at 3780,2230 h30 r180; Top Overlay "26" at 3810,1605 h30 r90; Top Overlay "1" at 3230,1590 h30